# Altium PCB PCB4 (Manual routing).PcbDoc
Units mm, origin at the board's own origin, x right, y up, seen from the top; angles counter-clockwise.
Board outline 24.54 x 12.57 mm, 2 copper layers (Top Layer, Bottom Layer); 9 components, 6 nets, 22 pads, 7 vias.
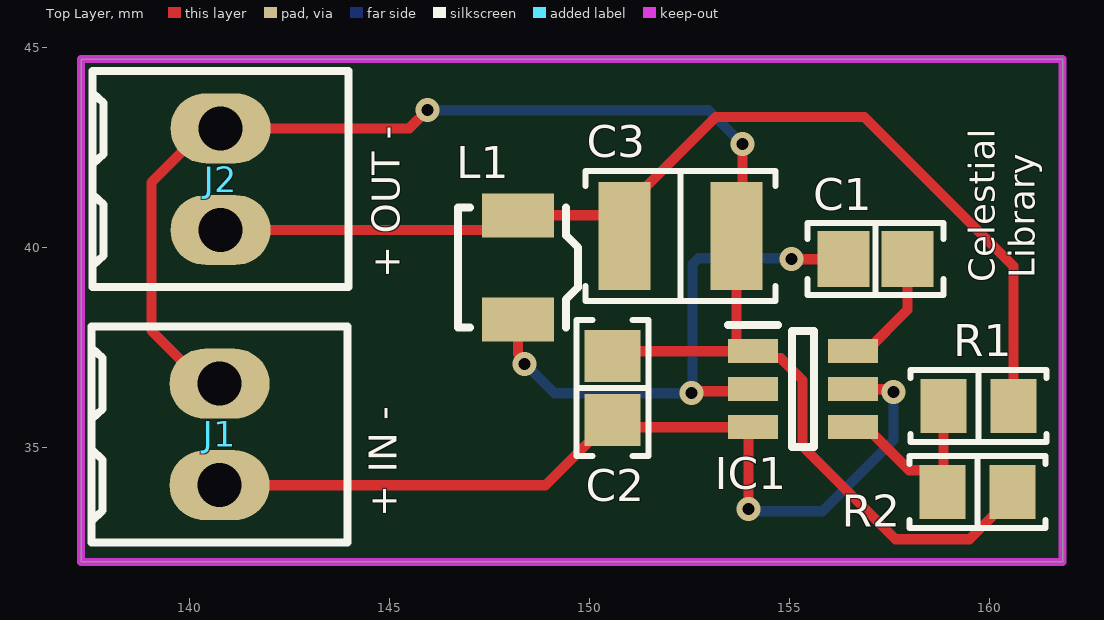
[diagram p0: Top Layer view]
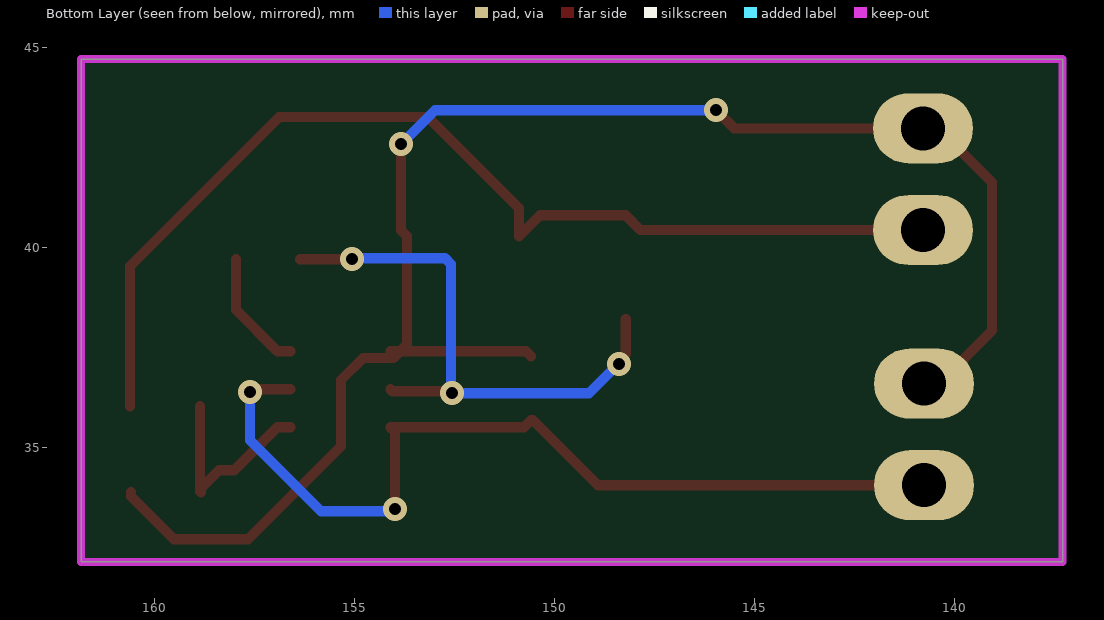
[diagram p1: Bottom Layer view, seen from below]
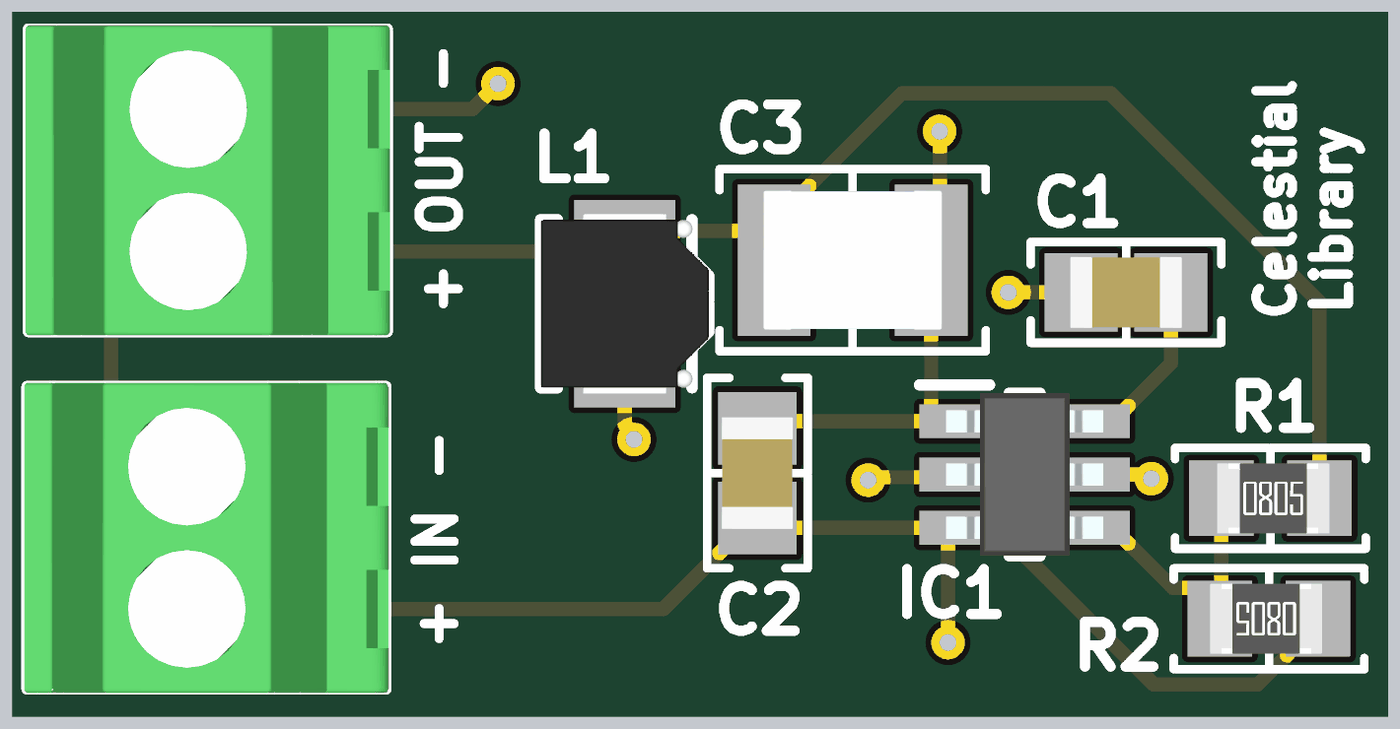
[diagram p2: 3D render of the assembled board from above, using the file's embedded part models]

## Layer stack, top to bottom
Top Solder: solder mask 0.0102, Solder Resist, Dk 3.5
Top Layer: signal copper 0.0356
Dielectric 1: dielectric 0.32, FR-4, Dk 4.8
Bottom Layer: signal copper 0.0356
Bottom Solder: solder mask 0.0102, Solder Resist, Dk 3.5

## Board outline
137.287,32.131 161.825,32.131 161.825,44.704 137.287,44.704

## Design rules (kind name [scope] priority, off if disabled: settings)
Clearance [All] p1: gap=0.254 ignorepadtopadclearanceinfootprint=FALSE except(0: Arc-Hole Track-Hole SMDPad-Hole THPad-Hole Via-Hole Fill-Hole Poly-Hole Region-Hole Text-Hole)
HoleToHoleClearance [All] p1: gap=0.16 allowstackedmicrovias=TRUE
MinimumSolderMaskSliver [All] p1: minsoldermaskwidth=0.16
PolygonConnect [All] p1: connectstyle=Direct reliefconductorwidth=0.254 reliefentries=4 polygonreliefangle="90 Angle" airgapwidth=0.254
RoutingVias [All] p1: holewidth=0.3 width=0.6 viastyle="Through Hole" minholewidth=0.3 minwidth=0.6 maxholewidth=0.3 maxwidth=0.6
SilkToSilkClearance [All] p1: silktosilkclearance=0.16
SilkToSolderMaskClearance [IsPad] p1: minsilkscreentomaskgap=0.16 clearancetoexposedcopper=TRUE
SolderMaskExpansion [All] p1: expansion=0.102 istentingtop=FALSE
Width [All] p1: maxlimit=0.254 minlimit=0.254 preferedwidth=0.254
26 further rules are at their usual default settings.

## Components (designator, comment, footprint, x,y, rotation, side; value= is the part's Value field where it differs from the comment)
C1 "0.1µF" "CAP 0805_2012" 157.15,39.7 r180 top
C2 "22µF" "CAP 0805_2012" 150.575,36.475 r270 top
C3 "47µF" "CAP 1210_3225 - 2.8MM" 152.275,40.275 r180 top
IC1 "TPS561208DDCR" SOT95P280X110-6N 155.341,36.449 r0 top
J1 "=PartNumber" "TE 282834-2" 140.75,35.32 r90 top
J2 "=PartNumber" "TE 282834-2" 140.775,41.7 r90 top
L1 "4.7µH" "TDK SPM3012-LR" 148.209,39.497 r90 top
R1 "56.2 kOhms" "RES 0805_2012" 159.725,36.025 r0 top
R2 "10 kOhms" "RES 0805_2012" 159.7,33.875 r180 top

## Footprints (in the part's own frame and the unit in brackets; to place one, negate y for a bottom-side part, rotate by r counter-clockwise, add the part's x,y. Pads: shape width x height; smd on the part's side, far side on the other; paste and mask are expansions set on the pad)
"CAP 0805_2012" [mm] "Chip Capacitor, 2-Leads, Body 2.00x1.20mm, IPC Medium Density"
  rect 1.3x1.4 smd: 1(-0.8,0) 2(0.8,0)
  silkscreen extent -1.7,-0.9 1.7,0.9, body extent -1,-0.64 1,0.64, height 1.26
"CAP 1210_3225 - 2.8MM" [mm] "Chip Capacitor, 2-Leads, Body 3.20x2.50mm, IPC Medium Density"
  rect 1.3x2.7 smd: 1(-1.4,0) 2(1.4,0)
  silkscreen extent -2.37,-1.63 2.37,1.63, body extent -1.6,-1.25 1.6,1.25, height 2.8
"RES 0805_2012" [mm] "Chip Resistor, 2-Leads, Body 2.00x1.25mm, IPC Medium Density"
  rect 1.15x1.35 smd: 1(-0.875,0) 2(0.875,0)
  silkscreen extent -1.7,-0.9 1.7,0.9, body extent -0.95,-0.62 1.05,0.63, height 0.6
SOT95P280X110-6N [mm]
  rect 1.25x0.6 smd: 1(-1.25,0.95) 2(-1.25,0) 3(-1.25,-0.95) 4(1.25,-0.95) 5(1.25,0) 6(1.25,0.95)
  silkscreen extent -1.88,-1.45 0.28,1.6, body extent -1.4,-1.45 1.4,1.45, height 1.1
"TDK SPM3012-LR" [mm] "Inductor, 2-Leads, Body 3.00x3.00mm, IPC Medium Density"
  rect 1.1x1.8 smd: 1(-1.3,0) 2(1.3,0)
  silkscreen extent -1.5,-1.5 1.5,1.5, body extent -1.6,-1.5 1.6,1.5, height 1.2
"TE 282834-2" [mm]
  oval 1.75x2.5 hole 1.1: 1(-1.27,0) 2(1.27,0)
  silkscreen extent -2.7,-3.2 2.7,3.2, body extent -2.77,-3.25 2.77,3.25, height 10

## Part data
C1: library part CC0805MRX7R9BB104, "CAP CER 0.1UF 50V X7R 0805", Device Package="0805 (2012 Metric)", Manufacturer=Yageo, Operating Temperature="-55°C ~ 125°C", Supplier Part Number 1=311-4351-1-ND, Temperature Coefficient=X7R, Tolerance=±20%, Voltage - Rated=50V, Applications="General Purpose", Capacitance=0.1µF, ComponentLink1Description=Datasheet, ComponentLink1URL=https://www.yageo.com/upload/media/product/productsearch/datasheet/mlcc/UPY-GPHC_X7R_6.3V-to-50V_18.pdf, ComponentLink2Description="DigiKey Link", ComponentLink2URL=http://digikey.com/product-detail/en/yageo/CC0805MRX7R9BB104/311-4351-1-ND/8025440, LastUpdated="1/21/2020 12:03:06 AM", Lifecycle Status=Active, Minimum Order=1, Mounting Type="Surface Mount, MLCC", Package / Case="0805 (2012 Metric)", Packaging=TapeAndReel, Part Number=CC0805MRX7R9BB104, Part Status=Active, PartId=2475, Price=0.02, Series=CC, Size / Dimension="0.079\" L x 0.049\" W (2.00mm x 1.25mm)", Supplier 1=DigiKey, Thickness (Max)="0.037\" (0.95mm)"
C2: library part CL21A226KOQNNNG, "CAP CER 22UF 16V X5R 0805", Device Package="0805 (2012 Metric)", Manufacturer="Samsung Electro-Mechanics", Operating Temperature="-55°C ~ 85°C", Supplier Part Number 1=1276-7092-1-ND, Temperature Coefficient=X5R, Tolerance=±10%, Voltage - Rated=16V, Applications="General Purpose", Capacitance=22µF, ComponentLink1Description=Datasheet, ComponentLink1URL=//media.digikey.com/pdf/Data%20Sheets/Samsung%20PDFs/CL21A226KOQNNNG_Spec.pdf, ComponentLink2Description="DigiKey Link", ComponentLink2URL=http://digikey.com/product-detail/en/samsung-electro-mechanics/CL21A226KOQNNNG/1276-7092-1-ND/8021509, LastUpdated="1/21/2020 12:03:05 AM", Lifecycle Status=Active, Minimum Order=1, Mounting Type="Surface Mount, MLCC", Package / Case="0805 (2012 Metric)", Packaging=TapeAndReel, Part Number=CL21A226KOQNNNG, Part Status=Active, PartId=3000, Price=0.09, Series=CL, Size / Dimension="0.079\" L x 0.049\" W (2.00mm x 1.25mm)", Supplier 1=DigiKey, Thickness (Max)="0.055\" (1.40mm)"
C3: library part GRM32EC81C476KE15L, "CAP CER 47UF 16V X6S 1210", Device Package="1210 (3225 Metric)", Manufacturer="Murata Electronics", Operating Temperature="-55°C ~ 105°C", Supplier Part Number 1=490-10531-1-ND, Temperature Coefficient=X6S, Tolerance=±10%, Voltage - Rated=16V, Applications="General Purpose", Capacitance=47µF, ComponentLink1Description=Datasheet, ComponentLink1URL=https://search.murata.co.jp/Ceramy/image/img/A01X/G101/ENG/GRM32EC81C476KE15-01.pdf, ComponentLink2Description="DigiKey Link", ComponentLink2URL=http://digikey.com/product-detail/en/murata-electronics/GRM32EC81C476KE15L/490-10531-1-ND/5026469, LastUpdated="1/21/2020 12:30:50 AM", Lifecycle Status=Active, Minimum Order=1, Mounting Type="Surface Mount, MLCC", Package / Case="1210 (3225 Metric)", Packaging=TapeAndReel, Part Number=GRM32EC81C476KE15L, Part Status=Active, PartId=23627, Price=0.23, Series=GRM, Size / Dimension="0.126\" L x 0.098\" W (3.20mm x 2.50mm)", Supplier 1=DigiKey, Thickness (Max)="0.106\" (2.70mm)"
IC1: "Buck Switching Regulator IC Positive Adjustable 0.76V 1 Output 1A SOT-23-6 Thin, TSOT-23-6"
J1 J2: library part 282834-2, "TERM BLK 2P SIDE ENT 2.54MM PCB", Color=Green, Current=10A, Manufacturer="TE Connectivity AMP Connectors", Supplier Part Number 1=A98333-ND, Voltage=150V, ComponentLink1Description=Datasheet, ComponentLink1URL=https://www.te.com/commerce/DocumentDelivery/DDEController?Action=srchrtrv&DocNm=282834&DocType=Customer+Drawing&DocLang=English, ComponentLink2Description="DigiKey Link", ComponentLink2URL=http://digikey.com/product-detail/en/te-connectivity-amp-connectors/282834-2/A98333-ND/1150135, LastUpdated="1/15/2020 4:15:38 AM", Lifecycle Status=Active, Mating Orientation="Horizontal with Board", Minimum Order=1, Mounting Type="Through Hole", Number of Levels=1, Packaging=Bulk, Part Number=282834-2, Part Status=Active, Pitch="0.100\" (2.54mm)", Positions Per Level=2, Price=0.88, Series=Buchanan, Supplier 1=DigiKey, Wire Gauge="16-30 AWG", Wire Termination="Screw - Rising Cage Clamp"
L1: library part SPM3015T-4R7M-LR, "FIXED IND 4.7UH 1.8A 199.1 MOHM", Current - Saturation=3A, Current Rating (Amps)=1.8A, DC Resistance (DCR)="199.1mOhm Max", Device Package=Nonstandard, Inductance Frequency - Test=100kHz, Manufacturer="TDK Corporation", Operating Temperature="-40°C ~ 125°C", Supplier Part Number 1=445-174451-1-ND, Tolerance=±20%, ComponentLink1Description=Datasheet, ComponentLink1URL=https://product.tdk.com/info/en/catalog/datasheets/inductor_commercial_power_spm3015-lr_en.pdf?ref_disty=digikey, ComponentLink2Description="DigiKey Link", ComponentLink2URL=http://digikey.com/product-detail/en/tdk-corporation/SPM3015T-4R7M-LR/445-174451-1-ND/5962377, Height - Seated (Max)="0.047\" (1.20mm)", Inductance=4.7µH, LastUpdated="1/21/2020 3:26:10 AM", Lifecycle Status=Active, Material - Core=Metal, Minimum Order=1, Mounting Type="Surface Mount", Package / Case=Nonstandard, Packaging=TapeAndReel, Part Number=SPM3015T-4R7M-LR, Part Status=Active, PartId=139, Price=0.59, Series=SPM-LR, Shielding=Shielded, Size / Dimension="0.126\" L x 0.118\" W (3.20mm x 3.00mm)", Supplier 1=DigiKey, Type=Wirewound
R1: library part 7-2176093-1, "RES SMD 56.2K OHM 0.1% 1/4W 0805", Device Package="0805 (2012 Metric)", Manufacturer="TE Connectivity Passive Product", Operating Temperature="-55°C ~ 155°C", Power (Watts)="0.25W, 1/4W", Supplier Device Package=0805, Supplier Part Number 1=A110711CT-ND, Temperature Coefficient=±25ppm/°C, Tolerance=±0.1%, ComponentLink1Description=Datasheet, ComponentLink1URL=https://www.te.com/commerce/DocumentDelivery/DDEController?Action=srchrtrv&DocNm=1773272&DocType=DS&DocLang=English, ComponentLink2Description="DigiKey Link", ComponentLink2URL=http://digikey.com/product-detail/en/te-connectivity-passive-product/7-2176093-1/A110711CT-ND/4035066, Composition="Thin Film", Height - Seated (Max)="0.026\" (0.65mm)", LastUpdated="1/21/2020 1:40:37 AM", Lifecycle Status=Active, Minimum Order=1, Number of Terminations=2, Package / Case="0805 (2012 Metric)", Packaging=TapeAndReel, Part Number=7-2176093-1, Part Status=Active, PartId=47633, Price=0.15, Resistance="56.2 kOhms", Series="RP73P, Holsworthy", Size / Dimension="0.079\" L x 0.049\" W (2.00mm x 1.25mm)", Supplier 1=DigiKey
R2: library part AT0805FRE0710KL, "RES SMD 10K OHM 1% 1/8W 0805", Device Package="0805 (2012 Metric)", Manufacturer=Yageo, Operating Temperature="-55°C ~ 155°C", Power (Watts)="0.125W, 1/8W", Ratings=AEC-Q200, Supplier Device Package=0805, Supplier Part Number 1=YAG2132CT-ND, Temperature Coefficient=±50ppm/°C, Tolerance=±1%, ComponentLink1Description=Datasheet, ComponentLink1URL=http://www.yageo.com/documents/recent/PYu-AT_51_RoHS_L_5.pdf, ComponentLink2Description="DigiKey Link", ComponentLink2URL=http://digikey.com/product-detail/en/yageo/AT0805FRE0710KL/YAG2132CT-ND/5139580, Composition="Thin Film", Features="Anti-Sulfur, Automotive AEC-Q200, Moisture Resistant", Height - Seated (Max)="0.024\" (0.60mm)", LastUpdated="1/21/2020 1:49:26 AM", Lifecycle Status=Active, Minimum Order=1, Number of Terminations=2, Package / Case="0805 (2012 Metric)", Packaging=TapeAndReel, Part Number=AT0805FRE0710KL, Part Status=Active, PartId=29266, Price=0.10, Resistance="10 kOhms", Series=AT, Size / Dimension="0.079\" L x 0.049\" W (2.00mm x 1.25mm)", Supplier 1=DigiKey

## Via types
v1: diameter 0.6, hole 0.3, Top Layer to Bottom Layer, 7 vias

## Nets (pads, with @x,y where several pads share a name; then routed paths per layer and width w, separated by ;. In a path a pad name is that pad's centre, name@x,y a point inside that pad or via, vN(x,y) a via of type N, cw(c..) or ccw(c..) an arc to the next point about the centre after c; other vN are vias at no path point)
FB: IC1.4 R1.1 R2.2 | length 5.1
  Top Layer w0.254: IC1.4 156.916,35.499 157.992,34.423 158.377,34.423 158.825,33.975 R2.2 158.85,33.9 R1.1
GND: C2.1 C3.1 IC1.1 J1.2 J2.2 R2.1 | length 40.9
  Top Layer w0.254: J1.2 140.375,36.59 139.05,37.915 139.05,41.62 140.4,42.97 J2.2 145.495,42.97 v1(145.95,43.425) ; C2.1 150.699,37.399 IC1.1@153.848,37.399 ; v1(153.825,42.575) 153.825,40.425 C3.1 153.675,37.572 IC1.1@153.848,37.399 ; IC1.1 IC1.1@153.848,37.399 ; R2.1 160.575,33.775 159.5,32.7 157.65,32.7 155.325,35.025 155.325,36.679 154.778,37.226 154.021,37.226 IC1.1@153.848,37.399
  Bottom Layer w0.254: v1(145.95,43.425) 152.975,43.425 v1(153.825,42.575)
IN: C2.2 IC1.3 IC1.5 J1.1 | length 22.8
  Top Layer w0.254: J1.1 148.9,34.05 150.525,35.675 C2.2 150.751,35.499 IC1.3 153.975,35.383 v1(153.975,33.45) ; IC1.5 157.526,36.449 v1(157.6,36.375)
  Bottom Layer w0.254: v1(153.975,33.45) 154.025,33.4 155.825,33.4 157.6,35.175 v1(157.6,36.375)
NetC1_1: C1.1 IC1.6 | length 3.1
  Top Layer w0.254: IC1.6 156.916,37.399 157.95,38.433 C1.1
OUT: C3.2 J2.1 L1.2 R1.2 | length 26.9
  Top Layer w0.254: J2.1 147.842,40.43 L1.2 150.353,40.797 C3.2 150.875,40.975 153.156,43.256 156.869,43.256 160.6,39.525 R1.2
SW: C1.2 IC1.2 L1.1 | length 14.4
  Top Layer w0.254: L1.1 148.209,37.335 148.375,37.169 v1(148.375,37.075) ; v1(152.55,36.35) 152.6,36.4 154.042,36.4 IC1.2 ; v1(155.05,39.7) C1.2
  Bottom Layer w0.254: v1(148.375,37.075) 148.4,37.075 149.125,36.35 v1(152.55,36.35) 152.575,36.375 152.575,39.576 152.724,39.725 154.925,39.725 154.975,39.675 155.025,39.725 v1(155.05,39.7)

## Polygon pours and split planes (outlines as drawn)
no net on Top Layer "Top Layer-No Net" (solid, pour order 16): 137.287,44.704
no net on Top Layer "Top Layer-No Net 1" (solid, pour order 13): 137.668,41.402
no net on Mechanical 1 (solid): 137.287,32.131

## Keep-outs
Keep-Out Layer:
  the board outline again, w0.2

## Other copper
Top Layer:
  pour cut-out: 146.673,40.005 146.678,38.975 149.733,38.975 149.733,40.005

## Silkscreen, mask and mechanical layers (free items; w line width, h text height)
Top Overlay:
  text "+ OUT -" at 145.25,39.225 h0.7 r90
  text "Library" at 161.125,39.225 h0.65 r90
  text "Celestial" at 160.125,39.125 h0.65 r90
  text "+ IN -" at 145.175,33.25 h0.7 r90